# Altium PCB Nano_Shield_PCB.PcbDoc
Units mil, origin at the board's own origin, x right, y up, seen from the top; angles counter-clockwise.
Board outline 3690 x 1795 mil, 2 copper layers (Top Layer, Bottom Layer); 12 components, 11 nets, 74 pads, 10 vias.
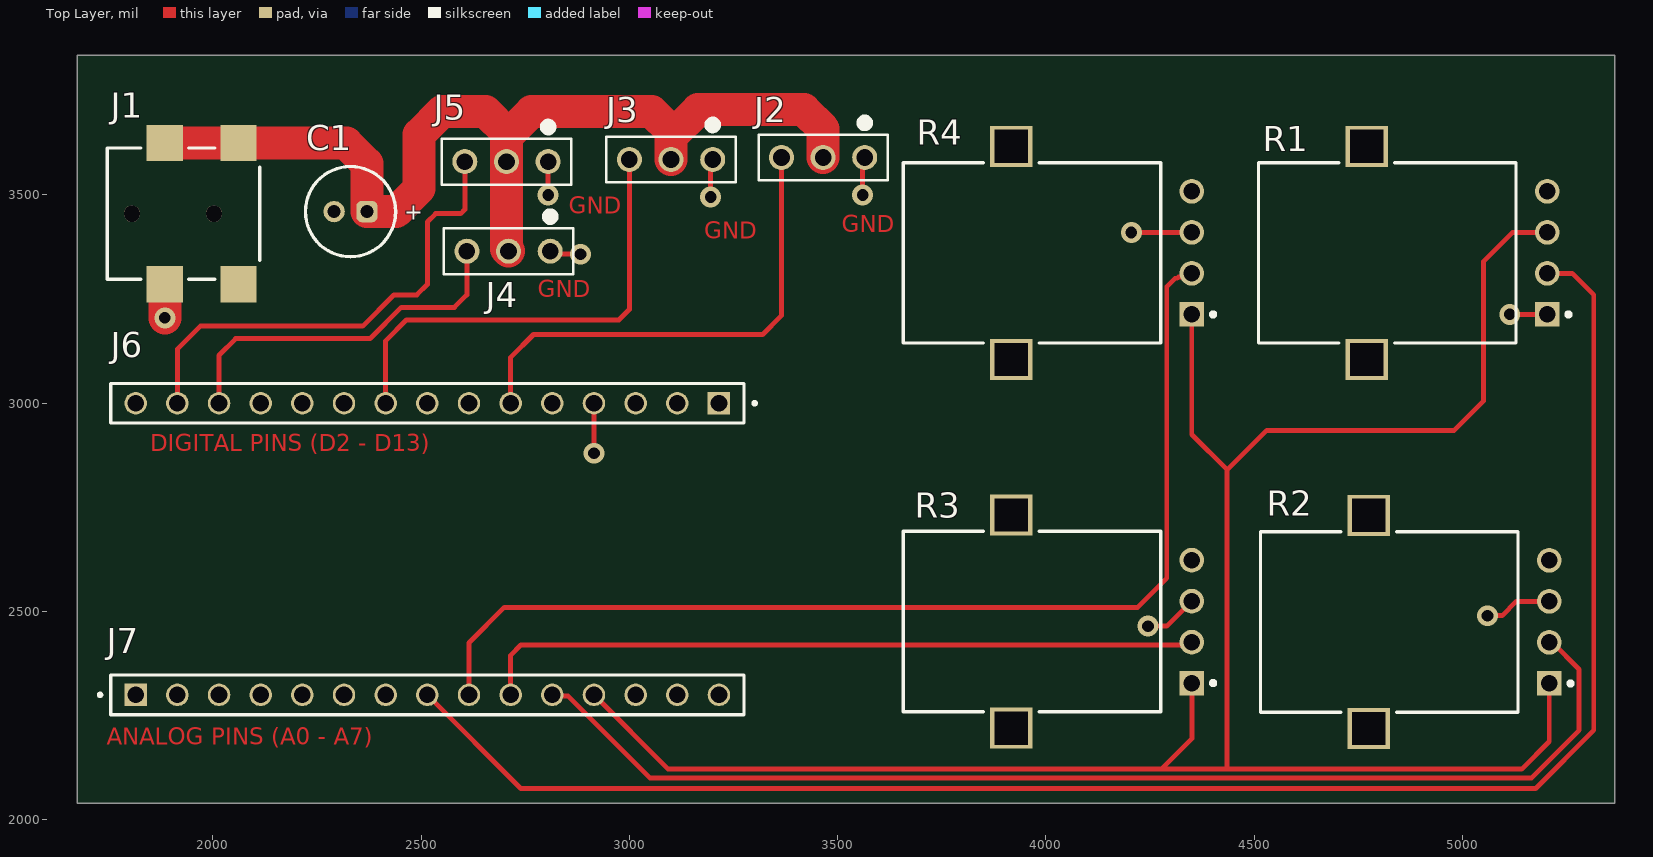
[diagram p0: Top Layer view]
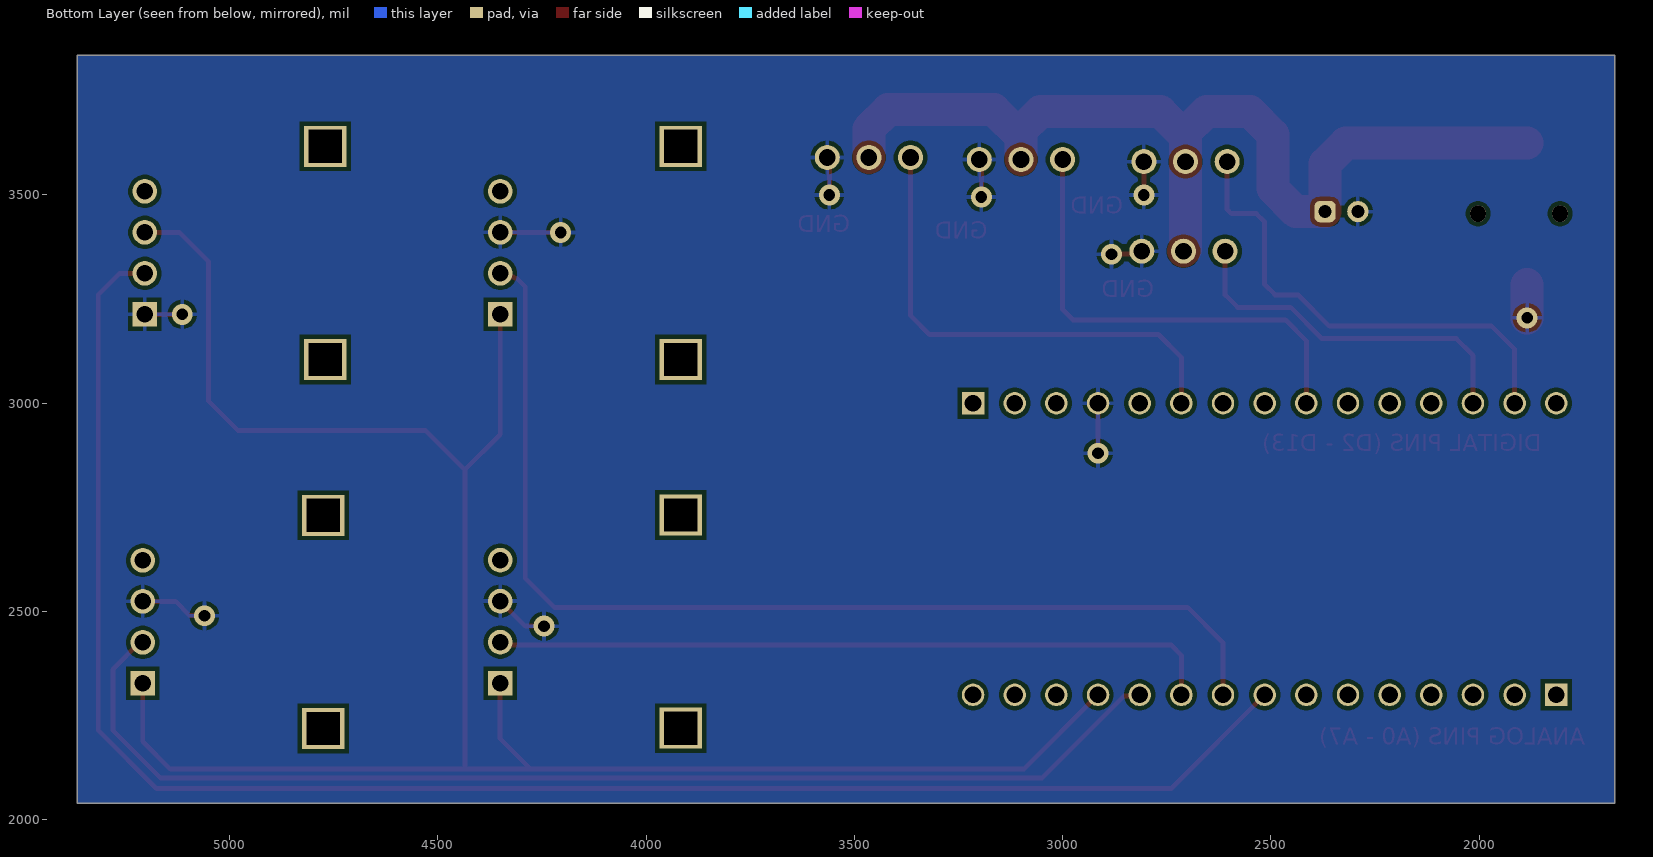
[diagram p1: Bottom Layer view, seen from below]
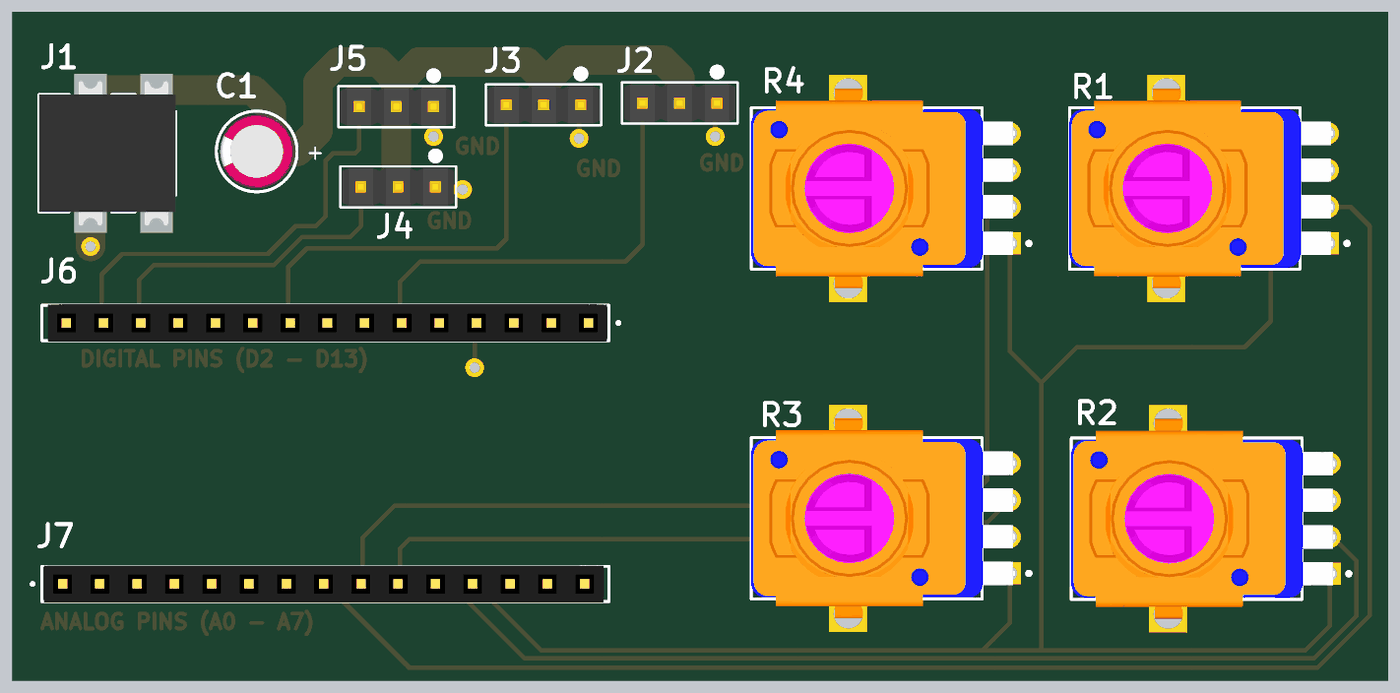
[diagram p2: 3D render of the assembled board from above, using the file's embedded part models]

## Layer stack, top to bottom
Top Solder: solder mask 0.4, Solder Resist, Dk 3.5
Top Layer: signal copper 1.4
Dielectric 1: dielectric 12.6, FR-4, Dk 4.8
Bottom Layer: signal copper 1.4
Bottom Solder: solder mask 0.4, Solder Resist, Dk 3.5

## Board outline
1675,2040 1675,3835 5365,3835 5365,2040

## Design rules (kind name [scope] priority, off if disabled: settings)
Clearance [All] p1: gap=10 ignorepadtopadclearanceinfootprint=FALSE
Height [All] p1: minheight=0 maxheight=2000 prefheight=500
PolygonConnect [All] p1: connectstyle=Relief reliefconductorwidth=10 reliefentries=4 polygonreliefangle="90 Angle" airgapwidth=10
RoutingVias [All] p1: holewidth=28 width=50 viastyle="Through Hole" minholewidth=28 minwidth=50 maxholewidth=28 maxwidth=50
SilkToSilkClearance [All] p1: silktosilkclearance=8
SilkToSolderMaskClearance [IsPad] p1: minsilkscreentomaskgap=8 clearancetoexposedcopper=TRUE
SolderMaskExpansion [All] p1: expansion=0 istentingtop=FALSE
SupplyNets "Schematic Supply Nets_1" [InNet('+5')] p1: voltage=0.000
SupplyNets "Schematic Supply Nets" [InNet('GND')] p2: voltage=0.000
Width GND_width [All] p1: maxlimit=100 minlimit=10 preferedwidth=11.81
Width Width_1 [All] p2: maxlimit=10 minlimit=10 preferedwidth=10
Width Power_width [InNet('+5')] p3: maxlimit=100 minlimit=10 preferedwidth=11.81
27 further rules are at their usual default settings.

## Classes and differential pairs
component class "Power + Servo Connections": C1 J1 J2 J3 J5
component class "Arduino_Nano + Potentiometers": J6 J7 R1 R2 R3 R4 U1

## Components (designator, comment, footprint, x,y, rotation, side; value= is the part's Value field where it differs from the comment)
C1 "22µF" WCAP-ATG5_D5H11 2330.63,3460 r0 top
J1 "694102107102" 694102107102 1930,3455 r270 top
J2 "PEC03SAAN" CONN_PEC03SAAN_SUL 3565,3590 r180 top
J3 "PEC03SAAN" CONN_PEC03SAAN_SUL 3200,3585 r180 top
J4 "PEC03SAAN" CONN_PEC03SAAN_SUL 2810,3365 r180 top
J5 "PEC03SAAN" CONN_PEC03SAAN_SUL 2805,3580 r180 top
J6 "SSQ-115-01-G-S" SAMTEC_SSQ-115-01-G-S 2515,3000 r180 top
J7 "SSQ-115-01-G-S" SAMTEC_SSQ-115-01-G-S 2515,2300 r0 top
R1 "RK11K1140A3L" ALPS-RK11K1140A3L_V 5203.07,3360.91 r90 top
R2 "RK11K1140A3L" ALPS-RK11K1140A3L_V 5208.07,2475.09 r90 top
R3 "RK11K1140A3L" ALPS-RK11K1140A3L_V 4350.07,2475.91 r90 top
R4 "RK11K1140A3L" ALPS-RK11K1140A3L_V 4350.07,3360.91 r90 top

## Footprints (in the part's own frame and the unit in brackets; to place one, negate y for a bottom-side part, rotate by r counter-clockwise, add the part's x,y. Pads: shape width x height; smd on the part's side, far side on the other; paste and mask are expansions set on the pad)
694102107102 [mm] "DC Power Jack Right Angled Low Profile SMT ?3.9 with 4 soldering pads & pegs"
  rect 2.2x2.2 smd: 1(-4.3,3.35) 1(-4.3,-1.15) 2(4.3,-1.15) 3(4.3,3.35)
  round 1 hole 1 unplated: MH1(0,1.85) MH2(0,-3.15)
  silkscreen extent -4,-4.65 4,4.65, body extent -4.9,-4.65 4.9,4.65, height 5.32
ALPS-RK11K1140A3L_V [mm] "THD, 4-Leads, Body 15.7x11mm, Pitch 2.5mm"
  rect 1.5x1.5 hole 1: 1(-3.75,0)
  round 1.5 hole 1: 2(-1.25,0) 3(1.25,0) 4(3.75,0)
  rect 2.5x2.6 hole 2 square: MH1(-6.5,11) MH2(6.5,11)
  silkscreen extent -5.5,-1.43 5.5,17.6, body extent -6.8,-0.38 6.8,17.62, height 27.5
CONN_PEC03SAAN_SUL [mil]
  round 60 hole 40 paste-99999 mask+0: 1(0,0) 2(100,0) 3(200,0)
  silkscreen extent -55,-93 255,55, body extent -50,-50 250,50, height 330
SAMTEC_SSQ-115-01-G-S [mm]
  rect 1.37x1.37 hole 1.02: 01(-17.78,0)
  round 1.37 hole 1.02: 02(-15.24,0) 03(-12.7,0) 04(-10.16,0) 05(-7.62,0) 06(-5.08,0) 07(-2.54,0) 08(0,0) 09(2.54,0) 10(5.08,0) 11(7.62,0) 12(10.16,0) 13(12.7,0) 14(15.24,0) 15(17.78,0)
  silkscreen extent -20.05,-1.2 19.31,1.2, body extent -19.18,-1.27 18.92,1.27, height 8
WCAP-ATG5_D5H11 [mm] "Aluminum Electrolytic Capacitors, 5x11mm"
  rrect50% 1.3x1.3 hole 0.8: 1(1,0)
  round 1.3 hole 0.8: 2(-1,0)
  silkscreen extent -2.75,-2.75 2.75,2.75, body extent -2.49,-2.5 2.5,2.5, height 11.31

## Part data
C1: library part 860020272001, "WCAP-ATG5 Aluminum Electrolytic Capacitor, Radial, THT, D5 x H11mm, 22µF, 10V", Capacitance Tolerance=+/-20%, Leakage Current=3µA, Manufacturer="Wurth Elektronik", Operating Temperature Max=105°C, Operating Temperature Min=-40°C, Rated Voltage (DC)=10V, Ripple Current=45mA, Capacitance=22µF, Category="Aluminum Electrolytic Capacitors", ComponentLink1Description="Website Link", ComponentLink1URL=https://www.we-online.com/redexpert/article/860020272001?ad, ComponentLink2Description="Datasheet Link", ComponentLink2URL=https://www.we-online.com/redexpert/spec/860020272001?ad, Diameter=5mm, Dissipation Factor=17%, Endurance=2000h, Height=11mm, Manufacturer Part Number=860020272001, Match Code=WCAP-ATG5, Mount="Through Hole", Packaging="Ammo Pack", Technical Reference=ATDC110220M010DSPA3B000
J1: "WR-DC DC Power Jack Connector, Male, Right Angled, 18V, 5A", Manufacturer="Wurth Elektronik", Operating Temperature Max=85°C, Operating Temperature Min=-40°C, Rated Current=5A, Working Voltage=18V, Category="DC Power Jack Connector", ComponentLink1Description="Website Link", ComponentLink1URL=https://www.we-online.com/redexpert/article/694102107102?ad, ComponentLink2Description="Datasheet Link", ComponentLink2URL=https://www.we-online.com/redexpert/spec/694102107102?ad, Gender=Male, Manufacturer Part Number=694102107102, Match Code=WR-DC, Mount="Surface Mount", Opening Diameter=3.9mm, Orientation="Right Angled", Packaging="Tape and Reel", Plug Inner Diameter=1.05mm, Plug Outer Diameter=3.5mm
J2 J3 J4 J5: "EVKIT PART-CONNECTOR; MALE; THROUGH HOLE; BREAKAWAY;", Manufacturer_Name=Sullins, Copyright="Copyright (C) 2026 Ultra Librarian. All rights reserved.", Manufacturer_Part_Number=PEC03SAAN, RefDes=RefDes, Type=Type
J6 J7: Package=None, Availability=Unavailable, MF=Samtec, MP=SSQ-115-01-G-S, Price=None
R1 R2 R3 R4: library part CMP-2000-06982-1, "Rotary Potentiometer, 0.05 W, -10 to 70 degC, 4-Pin THD, RoHS", Manufacturer=ALPS, Operating Temperature=-10to70°C, Package Description="4-Pin Through Hole Device, Body 15.7 x 11 mm, Pitch 2.5 mm", Power Rating=1/20W, Resistance Value=10KOhm, Tolerance=20%, Datasheet URL=https://datasheet.ciiva.com/11830/0900766b8012456b-11830811.pdf, Datasheet Version=05/2002, Manufacturer URL=http://www.alps.com/e/, Mounting=PanelMount/BracketMount, Mounting Technology=ThroughHole, Number of Turns=1(Elec)|1(Mech)Turns, Package Reference=RK11K1140A3L, Packaging=Trays, Rad Hard=No, Shaft Diameter=6mm, Type=Potentiometer

## Via types
v1: diameter 50, hole 28, Top Layer to Bottom Layer, 10 vias

## Nets (pads, with @x,y where several pads share a name; then routed paths per layer and width w, separated by ;. In a path a pad name is that pad's centre, name@x,y a point inside that pad or via, vN(x,y) a via of type N, cw(c..) or ccw(c..) an arc to the next point about the centre after c; other vN are vias at no path point)
5V_NANO: J7.12 R1.3 R2.1 R3.1 R4.1 | length 5097.7
  Top Layer w11.81: J7.12 3093.19,2121.81 4276.81,2121.81 ; R3.1 4350.07,2195.07 4276.81,2121.81 ; R4.1 4350,3213.2 4350,2925 4435,2840 ; R1.3 5120.12,3410.12 5050,3340 5050,3005 4980,2935 4530,2935 4435,2840 ; R2.1 5208.07,2188.07 5141.81,2121.81 4435,2121.81 ; 4276.81,2121.81 4435,2121.81 ; 4435,2121.81 4435,2840
+5: C1.1 J1.1 J2.2 J3.2 J4.2 J5.2 | length 2403.7
  Top Layer w79: J1.1@1884.73,3624.29 1885,3624.56 1885,3625 1885.71,3624.29 2061.89,3624.29 2320.71,3624.29 2370,3575 C1.1 2440,3460 2495,3515 2495,3645 2550,3700 2655,3700 2705,3650 ; J4.2 2705,3370 J5.2 2705,3640 2765,3700 3053.72,3700 3100,3653.72 ; J3.2 3100,3640 3165,3705 3418.72,3705 3465,3658.72 J2.2
A4: J7.08 R1.2 | length 4129.5
  Top Layer w11.81: J7.08 2740,2075 5175,2075 5315,2215 5315,3260 5263.31,3311.69 R1.2
A5: J7.09 R4.2 | length 2637.4
  Top Layer w11.81: J7.09 2615,2425 2700,2510 4220,2510 4290,2580 4290,3280 4310,3300 4315,3300 4317.65,3302.65 4341.03,3302.65 R4.2
A6: J7.10 R3.2 | length 1743.2
  Top Layer w11.81: J7.10 2715,2395 2740,2420 4343.38,2420 R3.2
A7: J7.11 R2.2 | length 2840.2
  Top Layer w11.81: J7.11 2817.29,2297.71 2852.29,2297.71 3050,2100 5165,2100 5280,2215 5280,2360.78 5214.9,2425.88 R2.2
D3: J2.3 J6.06 | length 1183.5
  Top Layer w11.81: J6.06 2715,3110 2770,3165 3320,3165 3365,3210 3365,3585 J2.3@3360,3590
D6: J3.3 J6.09 | length 1126.2
  Top Layer w11.81: J6.09 2415,3145 2414.89,3145.11 2414.89,3149.89 2465,3200 2975,3200 3000,3225 J3.3
D10: J4.3 J6.13 | length 875.1
  Top Layer w11.81: J6.13 2015,3115 2055,3155 2377.39,3155 2452.39,3230 2580,3230 2610,3260 J4.3
D11: J5.3 J6.14 | length 1163
  Top Layer w11.81: J6.14 1915,3130 1970,3185 2360,3185 2435,3260 2490,3260 2515,3285 2515,3435 2535,3455 2541.32,3455 ; 2540,3455 2595,3455 2605,3465 J5.3
GND: C1.2 J1.2 J2.1 J3.1 J4.1 J5.1 J6.04 R1.1 R2.3 R3.3 R4.3 | length 1063.3
  Top Layer w11.81: J4.1@2802.5,3357.77 v1(2882.77,3357.77) ; v1(2805,3500) J5.1 ; v1(2915,2880) J6.04 ; v1(3195,3495) J3.1@3195,3590 ; v1(3560,3500) J2.1@3560,3590 ; v1@4215,3410 4349.95,3410 R4.3 ; v1(4245,2465) 4289.95,2465 R3.3 ; v1(5060,2490) 5095,2490 5129.31,2524.31 R2.3 ; v1(5113.27,3213.27) R1.1
  Top Layer w59: J1.2 J1.2@1885,3285.44
  Top Layer w79: v1(1885,3205) J1.2@1885,3285.44
  other v1: 4205,3410
pads on no net: J1.3 J1.MH1 J1.MH2 J6.01 J6.02 J6.03 J6.05 J6.07 J6.08 J6.10 J6.11 J6.12 J6.15 J7.01 J7.02 J7.03 J7.04 J7.05 J7.06 J7.07 J7.13 J7.14 J7.15 R1.4 R1.MH1 R1.MH2 R2.4 R2.MH1 R2.MH2 R3.4 R3.MH1 R3.MH2 R4.4 R4.MH1 R4.MH2

## Polygon pours and split planes (outlines as drawn)
GND on Bottom Layer "GND_L02_P000" (solid, pour order 0): 1675,3835 5365,3835 5365,2040 1675,2040

## Other copper
Top Layer:
  text "GND" at 2855,3455 h40
  text "GND" at 3510,3410 h40
  text "GND" at 3180,3395 h40
  text "GND" at 2780,3255 h40
  text "DIGITAL PINS (D2 - D13)" at 1850,2885 h40
  text "ANALOG PINS (A0 - A7)" at 1745,2180 h40

## Silkscreen, mask and mechanical layers (free items; w line width, h text height)
Top Courtyard:
  lines w39.37: 1675,3835 1675,2040 5365,2040 5365,3835 1685,3835

## Text inside footprints (layer, text, board x,y; h text height)
C1: Top Overlay "+" at 2460,3440 h39.37